# Altium PCB BRD140720.pcbdoc
Units mm, origin at the board's own origin, x right, y up, seen from the top; angles counter-clockwise.
Board outline 50 x 20 mm, 2 copper layers (Top Layer, Bottom Layer), stack 1.621 mm thick; 18 components, 13 nets, 51 pads, 10 vias.
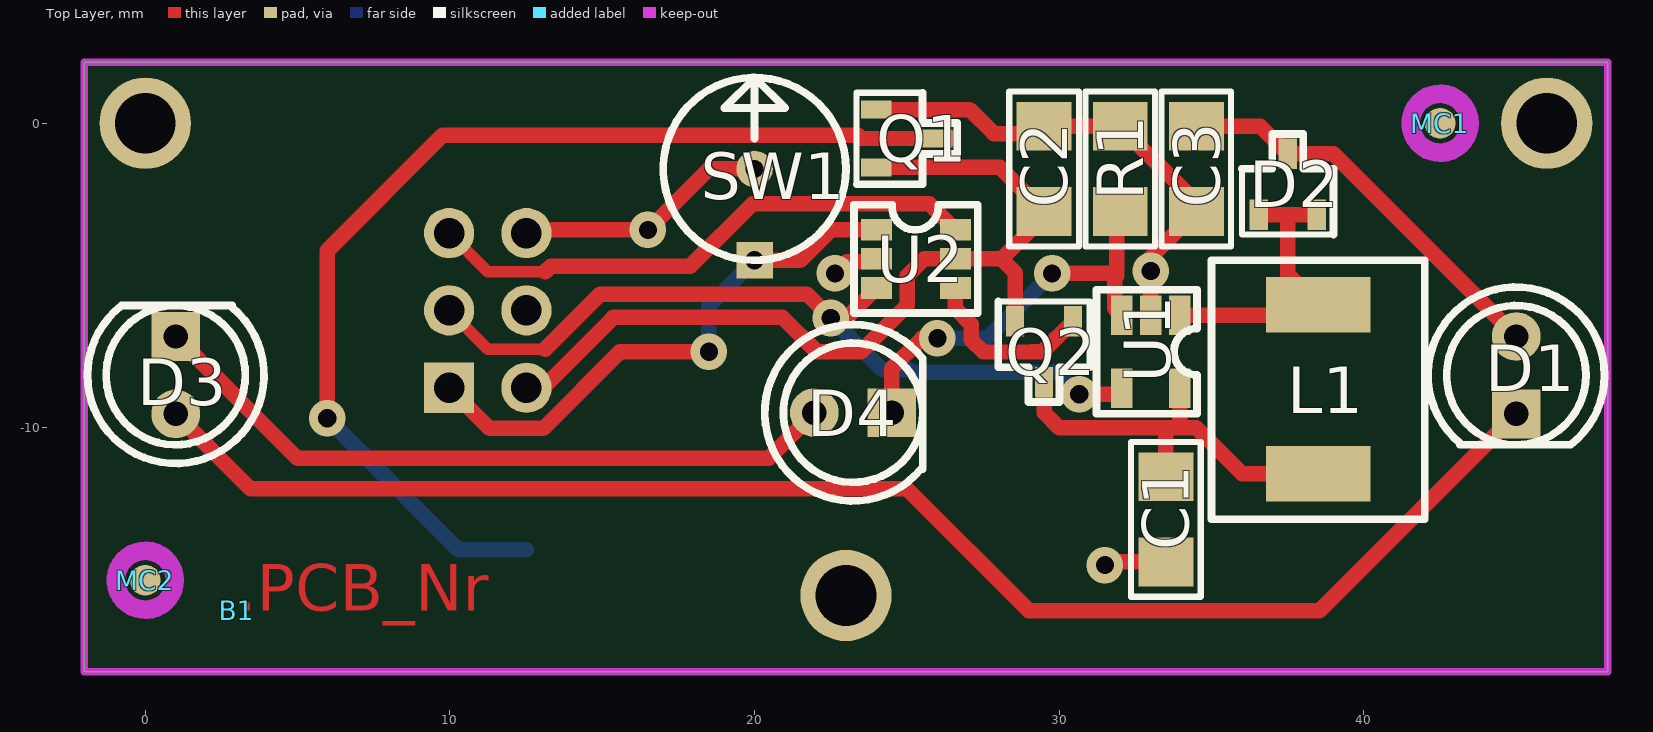
[diagram p0: Top Layer view]
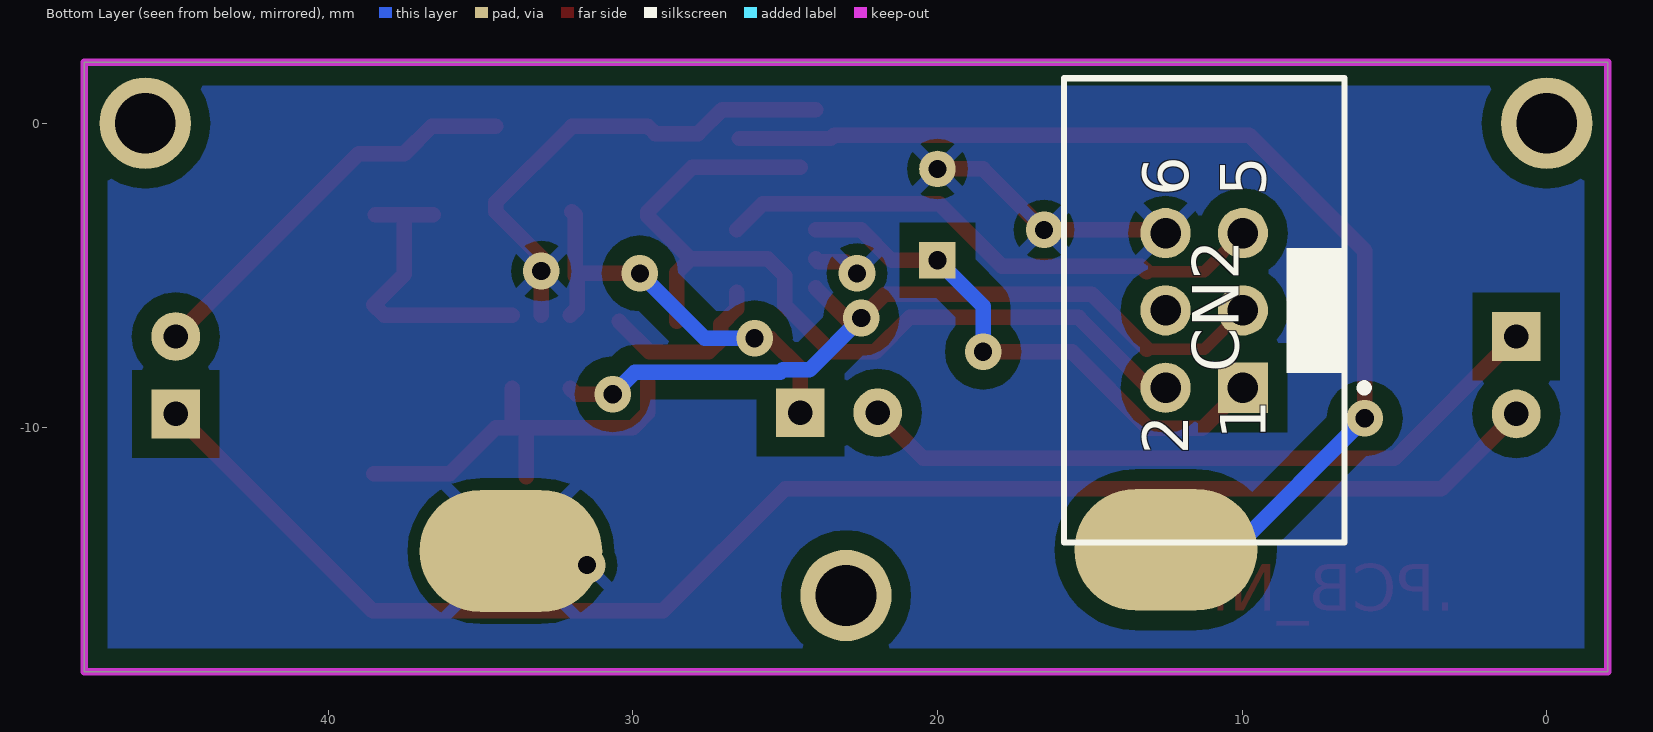
[diagram p1: Bottom Layer view, seen from below]
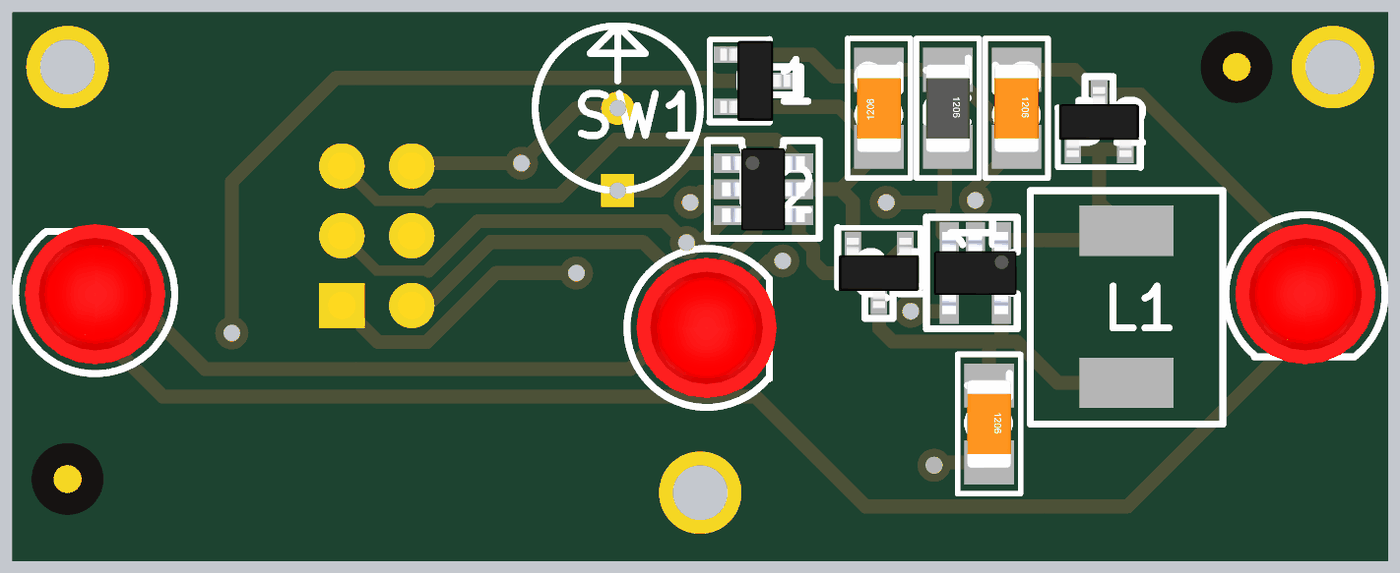
[diagram p2: 3D render of the assembled board from above, using the file's embedded part models]

## Layer stack, top to bottom
Top Layer: signal copper 0.0356
Dielectric: core 1.55, FR-4, Dk 4.8
Bottom Layer: signal copper 0.0356

## Board outline
-2,-18 48,-18 48,2 -2,2

## Design rules (kind name [scope] priority, off if disabled: settings)
Clearance SC_SOT23-5 [HasFootprint('SC_SOT23-5AM') vs HasFootprint('SC_SOT23-5AM')] p1: gap=0.229
Clearance SC_SOT23-6 [HasFootprint('SC_SOT23-6') vs HasFootprint('SC_SOT23-6')] p2: gap=0.229
Clearance Clearance_polygons [InPolygon] p3: gap=0.635
Clearance Clearance_All [All] p4: gap=0.254
HoleSize [All] p1: absolutevalues=TRUE maxlimit=3.2 minlimit=0.6 maxpercent=80.000 minpercent=20.000
MinimumAnnularRing [All] p1: minimumring=0.254
MinimumSolderMaskSliver SilkscreenOverComponentPads [All] p2: minsoldermaskwidth=0.254
PlaneClearance [All] p1: clearance=1.27
PolygonConnect [All] p1: connectstyle=Relief reliefconductorwidth=0.381 reliefentries=4 polygonreliefangle="45 Angle" airgapwidth=0.381
RoutingVias [All] p1: holewidth=0.6 width=1.2 viastyle="Through Hole" minholewidth=0.6 minwidth=1.2 maxholewidth=0.6 maxwidth=1.2
SolderMaskExpansion [All] p1: expansion=0
Width [All] p1: maxlimit=1.27 minlimit=0.381 preferedwidth=0.508
26 further rules are at their usual default settings.

## Components (designator, comment, footprint, x,y, rotation, side; value= is the part's Value field where it differs from the comment)
B1 "BRD140720/0" MC_BoardNr 3,-16 r0 top
C1 "YCAM10U" CA_1206 33.5,-13 r270 top
C2 "YCAM100N" CA_1206 29.5,-1.5 r90 top
C3 "YCAM100N" CA_1206 34.5,-1.5 r270 top
CN2 "0918_506_7324" CN_HARTING_918506X324 9.972,-8.683 r90 bottom
D1 "L-7113SEC-J3" DI_LED_5MM 45,-9.54 r90 top
D2 "YDIOBAT54-1" SC_SOT23 37.5,-2 r90 top
D3 "L-7113SEC-J3" DI_LED_5MM 1,-7 r270 top
D4 "L-7113SEC-J3" DI_LED_5MM 24.5,-9.5 r180 top
L1 "YCOL10U-1" CL_VISHAY_IHLP-2525CZ-01 38.5,-11.5 r90 top
MC1 "Fiducial" MC_FIDUCIAL 42.5,0 r0 top
MC2 "Fiducial" MC_FIDUCIAL 0,-15 r0 top
Q1 "YTRS2035" SC_SOT23 25,-0.5 r0 top
Q2 "YTRS2035" SC_SOT23 29.5,-7.5 r270 top
R1 "2E2 / 1%" RE_1206 32,-1.5 r270 top
SW1 "CW1300-1" SW_TILT_Comus_CW1300-1 20,-4.5 r0 top
U1 "FAN5333ASX" SC_SOT23-5AM 33,-7.5 r270 top
U2 "ATTINY4-TSHR" SC_SOT23-6 24,-3.5 r0 top

## Footprints (in the part's own frame and the unit in brackets; to place one, negate y for a bottom-side part, rotate by r counter-clockwise, add the part's x,y. Pads: shape width x height; smd on the part's side, far side on the other; paste and mask are expansions set on the pad)
CA_1206 [mm] "Chip Capacitor; Body 3.2 x 1.6 mm (LxW typ)"
  rect 1.6x1.8 smd: 1(-1.4,0) 2(1.4,0)
  silkscreen extent -2.54,-1.14 2.54,1.14, body extent -1.6,-0.8 1.6,0.8, height 1
CL_VISHAY_IHLP-2525CZ-01 [mm]
  rect 1.83x3.43 smd: 1(0,0) 2(5.54,0)
  silkscreen extent -1.5,-3.5 7,3.5
CN_HARTING_918506X324 [mm] "Connector; IDC, Low Profile Male Header, Thru-Hole; 6 Position; Vertical; Pitch 2.54 mm; Body 15.24 x 9.2 x 9.45 mm (LxWxH)"
  rect 1.65x1.65 hole 1: 1(0,0)
  round 1.65 hole 1: 2(0,2.54) 3(2.54,0) 4(2.54,2.54) 5(5.08,0) 6(5.08,2.54)
  silkscreen extent -5.08,-4.1 10.16,5.87, body extent -5.08,-3.18 10.16,6.02, height 9.45
DI_LED_5MM [mm] "LED 5mm"
  rect 1.6x1.6 hole 0.8: 1(0,0)
  round 1.6 hole 0.8: 2(2.54,0)
  silkscreen extent -1.02,-2.9 4.16,2.89, body extent -1.28,-2.55 3.82,2.55, height 8.6
MC_BoardNr [mm] "Board number"
MC_FIDUCIAL [mil] "Fiducial"
  round 40 smd paste-3937.01 mask+31.5: 0(0,0)
  Top Layer keep-out circle w24: c0,0 r38
RE_1206 [mm] "Chip Resistor; Body 3.2 x 1.6 mm (LxW typ)"
  rect 1.6x1.8 smd: 1(-1.4,0) 2(1.4,0)
  silkscreen extent -2.54,-1.14 2.54,1.14, body extent -1.6,-0.8 1.6,0.8, height 1
SC_SOT23 [mm] "SOT23, 3-Leads, Body 2.9x1.3mm, Pitch 0.95mm, Lead Span 2.3mm, IPC High Density"
  rect 1x0.6 smd: 1(-1,0.95) 2(-1,-0.95) 3(1,0)
  silkscreen extent -1.65,-1.5 1.65,1.5, body extent -1.27,-1.46 1.27,1.46, height 0.99
SC_SOT23-5AM [mm] "SOT23, 5-Leads, Body 2.9x1.7mm, Pitch 0.95mm, Lead Span 2.8mm, IPC Low Density"
  rect 1.3x0.7 smd: 1(-1.2,0.95) 2(-1.2,0) 3(-1.2,-0.95) 4(1.2,-0.95) 5(1.2,0.95)
  silkscreen extent -2.03,-1.78 2.03,1.52, body extent -1.5,-1.5 1.5,1.5, height 1.3
SC_SOT23-6 [mil] "SC_SOT23-6"
  rect 40x28 smd: 1(0,0) 2(0,-37.5) 3(0,-75) 4(102,-75) 5(102,-37.5) 6(102,0)
  silkscreen extent -29,-108 131,32, body extent -8,-97 110,22, height 51
SW_TILT_Comus_CW1300-1 [mm]
  rect 1.2x1.2 hole 0.6: 1(0,0)
  round 1.2 hole 0.6: 2(0,3)
  silkscreen extent -3,0 3,6, body extent -2.98,0.01 3,5.99, height 10

## Part data
B1: library part BARE_PCB
D2: "Dual Schottky Barrier Diode Common Cathode"
R1: library part ASC1206-2R2FT5, "Resistor"

## Free pads (board coordinates)
  round 3 hole 2 unplated: 0(0,0) 1(46,0) 2(23,-15.5)
  oval 6x4 smd far side: 2(12.5,-14) 3(34,-14.04)

## Via types
v1: diameter 1.2, hole 0.6, Top Layer to Bottom Layer, tented both sides, 10 vias

## Nets (pads, with @x,y where several pads share a name; then routed paths per layer and width w, separated by ;. In a path a pad name is that pad's centre, name@x,y a point inside that pad or via, vN(x,y) a via of type N, cw(c..) or ccw(c..) an arc to the next point about the centre after c; other vN are vias at no path point)
GND: C1.2 C2.2 C3.2 CN2.6 pad.3 Q1.1 R1.1 SW1.2 U1.2 U2.2 | length 28.2
  Top Layer w0.508: CN2.6 12.616,-3.5 v1(16.5,-3.5) 18.5,-1.5 SW1.2 ; v1(22.638,-4.929) 23.028,-4.539 23.914,-4.539 U2.2 ; Q1.1 27.062,0.45 27.854,-0.342 29.258,-0.342 C2.2 R1.1 34.5,-2.6 C3.2 33,-4.4 v1(33,-4.85) U1.2 ; v1(31.5,-14.5) 31.6,-14.4 C1.2
NetC1_1: C1.1 L1.1 Q2.3 U1.5 | length 13.7
  Top Layer w0.508: Q2.3 29.5,-9.5 30,-10 33.5,-10 ; C1.1 33.5,-10 ; U1.5 33.95,-9.95 34,-10 ; L1.1 36,-11.5 34.5,-10 34,-10 ; 33.5,-10 34,-10
NetC2_1: C2.1 CN2.2 Q1.2 Q2.2 U2.5 | length 28.8
  Top Layer w0.508: CN2.2 13.051,-8.683 15.365,-6.37 20.911,-6.37 22.041,-7.5 23.487,-7.5 25.016,-5.971 25.016,-5 25.563,-4.453 U2.5 28.103,-4.453 ; Q1.2@24.5,-1.45 28.05,-1.45 C2.1 29.5,-3.056 28.103,-4.453 ; Q2.2 28.55,-4.899 28.103,-4.453
NetC3_1: C3.1 D1.2 D2.3 | length 13.4
  Top Layer w0.508: C3.1 36.6,-0.1 D2.3 39,-1 D1.2
NetCN2_1: CN2.1 SW1.1 U2.1 | length 18.2
  Top Layer w0.508: CN2.1 11.305,-10.016 13.064,-10.016 15.581,-7.5 v1(18.5,-7.5) ; SW1.1 21.5,-4.5 22.5,-3.5 U2.1
  Bottom Layer w0.508: v1(18.5,-7.5) 18.5,-6 SW1.1
NetCN2_3: CN2.3 U1.4 U2.3 | length 26.3
  Top Layer w0.381: CN2.3 11.242,-7.413 13.127,-7.413
  Top Layer w0.508: 13.127,-7.413 14.933,-5.608 21.716,-5.608 v1(22.5,-6.392) ; v1@22.945,-6.46 U2.3 ; v1(30.654,-8.892) 31.858,-8.892 U1.4
  Bottom Layer w0.508: v1(22.5,-6.392) 24.2,-8.092 25.083,-8.092 25.16,-8.168 29.93,-8.168 v1(30.654,-8.892)
NetCN2_5: CN2.5 U2.6 | length 18.4
  Top Layer w0.381: CN2.5 11.242,-4.873 13.127,-4.873
  Top Layer w0.508: 13.127,-4.873 13.311,-4.69 17.888,-4.69 19.941,-2.636 25.727,-2.636 U2.6
NetD1_1: D1.1 D3.2 | length 49.4
  Top Layer w0.508: D3.2 3.46,-12 25,-12 29,-16 38.54,-16 D1.1
NetD2_1: D2.1 D2.2 L1.2 U1.1 | length 10
  Top Layer w0.508: U1.1 38.16,-6.3 L1.2 37.5,-4.96 37.5,-3 ; D2.1 37.5,-3 ; D2.2 37.5,-3
NetD3_1: D3.1 D4.2 | length 23.2
  Top Layer w0.508: D3.1 5,-11 20.46,-11 D4.2
NetD4_1: D4.1 R1.2 U1.3 | length 13.7
  Top Layer w0.508: D4.1 24.5,-8.054 25.494,-7.06 v1(26,-7.06) ; v1(29.764,-4.929) 31.821,-4.929 31.821,-6.071 U1.3 ; 31.892,-5 31.892,-3.008 R1.2
  Bottom Layer w0.508: v1(26,-7.06) 27.632,-7.06 v1(29.764,-4.929)
NetQ2_1: Q2.1 U2.4 | length 5.6
  Top Layer w0.508: U2.4@26.591,-5.551 26.591,-6.084 27.108,-6.602 27.108,-7.108 27.508,-7.508 28.974,-7.508 ; 29.076,-7.492 29.458,-7.492 Q2.1
VBAT: pad.2@12.5,-14 Q1.3 | length 36
  Top Layer w0.508: v1(5.972,-9.683) 5.972,-4.183 9.764,-0.392 23.392,-0.392 23.5,-0.5 Q1.3 Q1.3@26.5,-0.5
  Bottom Layer w0.508: v1(5.972,-9.683) 10.289,-14 pad.2@12.5,-14
pads on no net: CN2.4 MC1.0 MC2.0

## Polygon pours and split planes (outlines as drawn)
GND on Bottom Layer "gndbot" (solid, remove dead copper, pour order 2): -2,-18 -2,2 48,2 48,-18 -2,-18

## Keep-outs
Keep-Out Layer:
  the board outline again, w0.254

## Silkscreen, mask and mechanical layers (free items; w line width, h text height)
Mechanical 4:
  lines w0.127: -68.44,-78.6 -73.52,-78.6 ; -37.96,62.37 -68.44,62.37 ; -25.26,-78.6 -25.26,-73.52 ; -25.26,62.37 -25.26,67.45 ; 0.14,-65.875 114.44,-65.875 ; 0.14,-58.255 114.44,-58.255 ; 0.14,-50.635 38.24,-50.635 ; 23,-78.6 23,-73.52 ; 23,62.37 23,67.45 ; 38.24,-73.495 38.24,-58.255 38.24,-43.015 ; 71.26,-78.6 71.26,-73.52 ; 71.26,62.37 71.26,67.45 ; 91.58,-73.495 91.58,-58.255 ; 114.44,-78.6 119.52,-78.6 ; -73.52,-78.6 -73.52,67.45 119.52,67.45 119.52,-78.6 ; -73.52,-78.6 119.52,-78.6 ; -68.44,62.37 -68.44,-73.52 114.44,-73.52 114.44,62.37 -68.44,62.37 ; 0.14,-73.495 -35.42,-73.495 -35.42,-43.015 0.14,-43.015 ; 0.14,-73.495 114.44,-73.495 114.44,-43.015 38.24,-43.015 ; 0.14,-73.495 0.14,-43.015 ; 0.14,-43.015 38.24,-43.015 ; -73.52,-5.575 -68.44,-5.575 -73.52,-5.575 ; 114.44,-5.575 119.52,-5.575 114.44,-5.575
  text "A" at 95.009,65.393 h1.78 r90
  text "D" at -48.501,64.123 h1.78 r270
  text "C" at -0.876,64.123 h1.78 r270
  text "B" at 44.844,64.123 h1.78 r270
  text "2" at -70.091,31.738 h1.78 r90
  text "2" at 117.869,31.738 h1.78 r90
  text "1" at -70.091,-41.287 h1.78 r90
  text "1" at 117.869,-41.287 h1.78 r90
  text "ENGINEER:" at 1.41,-45.555 h1.14
  text "TITLE:" at 39.51,-45.555 h1.14
  text ".ProjectName" at 45.86,-52.362 h2.5
  text "PCB DESIGNER:" at 1.41,-53.048 h1.14
  text ".DrawnByX" at 14.237,-56.019 h2.5
  text "DATE:" at 1.41,-60.795 h1.14
  text "PART NO.:" at 39.51,-60.795 h1.14
  text "REV:" at 92.85,-60.795 h1.14
  text ".PRINT_DATE" at 2.68,-63.843 h1.78
  text ".RevisionNR" at 92.901,-64.173 h2.5
  text "FILE NAME:" at 1.41,-68.415 h1.14
  text "DWG NO:" at 39.51,-68.415 h1.14
  text "SCALE:" at 92.85,-68.415 h1.14
  text ".PCB_Nr" at 48.476,-70.853 h2.5
  text ".PCB_FILE_NAME_NO_PATH" at 2.68,-71.463 h1.78
  text "D" at -51.498,-76.695 h1.78 r270
  text "C" at -3.492,-76.695 h1.78 r270
  text "B" at 45.022,-76.695 h1.78 r270
  text "A" at 93.079,-76.695 h1.78 r270
Mechanical 5:
  lines w0.127: -68.44,-78.6 -73.52,-78.6 ; -68.44,-65.875 45.86,-65.875 ; -68.44,-58.255 45.86,-58.255 ; -45.58,-73.495 -45.58,-58.255 ; -25.26,-78.6 -25.26,-73.52 ; -25.26,62.37 -25.26,67.45 ; 7.76,-73.495 7.76,-58.255 7.76,-43.015 ; 7.76,-50.635 45.86,-50.635 ; 23,-78.6 23,-73.52 ; 23,62.37 23,67.45 ; 71.26,-78.6 71.26,-73.52 ; 71.26,62.37 71.26,67.45 ; 83.96,62.37 114.44,62.37 ; 114.44,-78.6 119.52,-78.6 ; -73.52,-78.6 -73.52,67.45 119.52,67.45 119.52,-78.6 ; -73.52,-78.6 119.52,-78.6 ; 7.76,-43.015 45.86,-43.015 ; 7.76,-43.015 -68.44,-43.015 -68.44,-73.495 45.86,-73.495 ; 45.86,-73.495 81.42,-73.495 81.42,-43.015 45.86,-43.015 ; 45.86,-73.495 45.86,-43.015 ; 114.44,62.37 114.44,-73.52 -68.44,-73.52 -68.44,62.37 114.44,62.37 ; -73.52,-5.575 -68.44,-5.575 -73.52,-5.575 ; 114.44,-5.575 119.52,-5.575 114.44,-5.575
  text "A" at -48.501,65.393 h1.78 r270
  text "B" at -0.876,65.393 h1.78 r270
  text "C" at 44.844,65.393 h1.78 r270
  text "D" at 93.104,65.393 h1.78 r270
  text "2" at -71.996,31.738 h1.78 r270
  text "2" at 115.964,31.738 h1.78 r270
  text "1" at -71.996,-41.287 h1.78 r270
  text "1" at 115.964,-41.287 h1.78 r270
  text "TITLE:" at 6.49,-45.555 h1.14
  text "ENGINEER:" at 44.59,-45.555 h1.14
  text ".ProjectName" at 1.029,-52.159 h2.5
  text "PCB DESIGNER:" at 44.59,-53.048 h1.14
  text ".DrawnByX" at 32.144,-56.096 h2.5
  text "REV:" at -46.85,-60.795 h1.14
  text "PART NO.:" at 6.49,-60.795 h1.14
  text "DATE:" at 44.59,-60.795 h1.14
  text ".PRINT_DATE" at 43.32,-63.843 h1.78
  text ".RevisionNR" at -46.037,-65.24 h2.5
  text "SCALE:" at -46.85,-68.415 h1.14
  text "DWG NO:" at 6.49,-68.415 h1.14
  text "FILE NAME:" at 44.59,-68.415 h1.14
  text ".PCB_FILE_NAME_NO_PATH" at 43.32,-71.463 h1.78
  text ".PCB_Nr" at -1.257,-71.717 h2.5
  text "B" at -3.416,-75.577 h1.78 r270
  text "C" at 44.844,-75.577 h1.78 r270
  text "D" at 93.104,-75.577 h1.78 r270
  text "A" at -51.676,-76.847 h1.78 r270
Mechanical 8:
  the board outline again, w0.254
Drill Drawing:
  lines w0.203: -65.9,-37.96 -65.9,-40.5 -63.36,-40.5 ; -65.9,58.56 -65.9,61.1 -63.36,61.1 ; 109.36,-40.5 111.9,-40.5 111.9,-37.96 ; 109.36,61.1 111.9,61.1 111.9,58.56
  text ".Legend" at -38.5,39.5 h1.52

## Dimensions
-2,2 to -2,-18 on Mechanical 2
-2,2 to 48,2 on Mechanical 2

## Text inside footprints (layer, text, board x,y; h text height)
CN2: Bottom Overlay "5" at 9.222,-2.403 h1.5 r270; Bottom Overlay "6" at 11.762,-2.403 h1.5 r270; Bottom Overlay "1" at 9.222,-10.383 h1.5 r270; Bottom Overlay "2" at 11.762,-10.883 h1.5 r270